# Altium PCB NM.BaseBoard.01.PcbDoc (part 2 of 2)
Units mm, origin at the board's own origin, x right, y up, seen from the top; angles counter-clockwise.
Board outline 100 x 120 mm, 2 copper layers (Top Layer, Bottom Layer), stack 0.747 mm thick; 54 components, 54 nets, 245 pads, 102 vias.
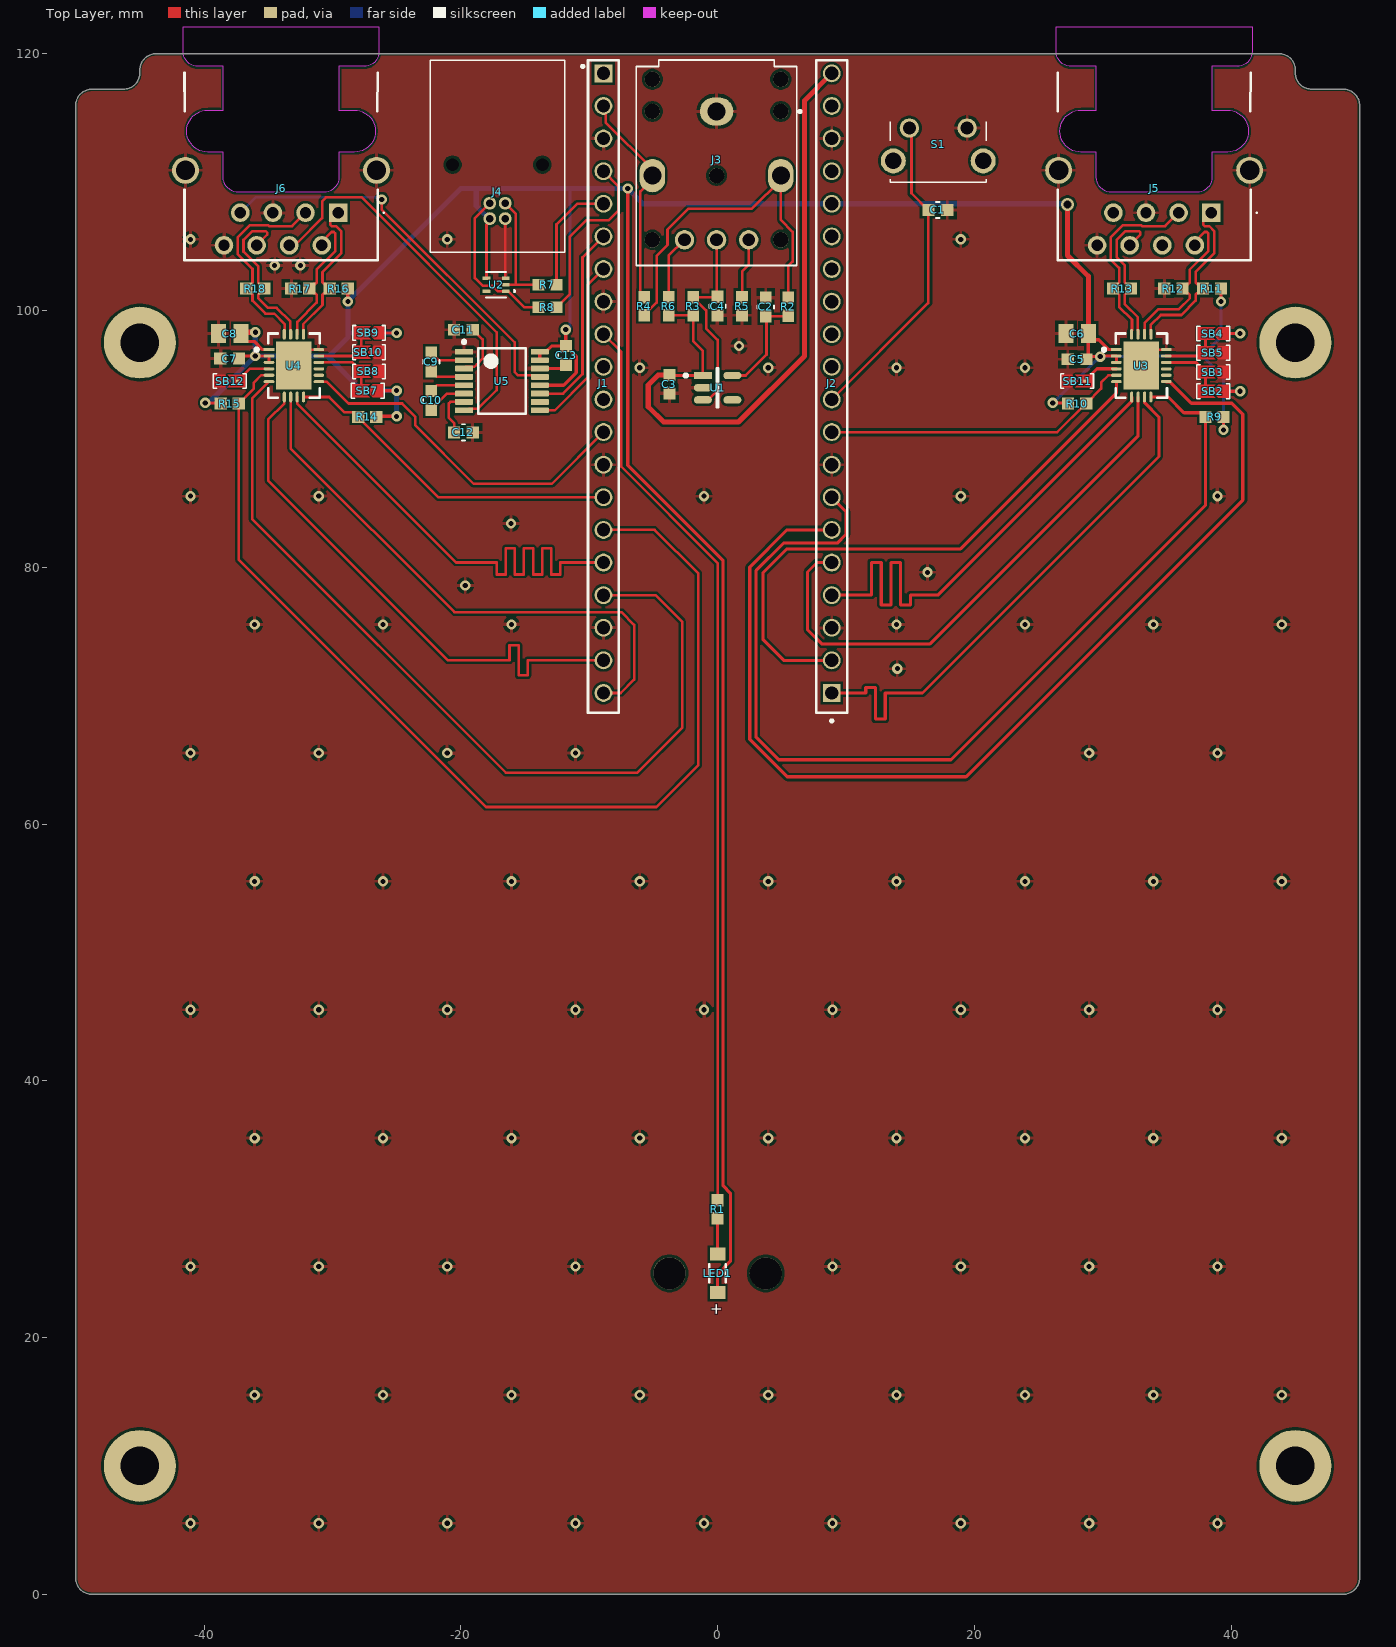
[diagram p0: Top Layer view]

## Silkscreen, mask and mechanical layers (free items; w line width, h text height) (continued)
Drill Drawing: (continued)
  text "Pad" at 188.228,9.38 h1.52
  text "(Mixed)" at 203.21,9.38 h1.52
  text "(Mixed)" at 222.153,9.38 h1.52
  text "101" at 74.468,5.57 h1.52
  text "15.75mil (0.400mm)" at 89.45,5.57 h1.52
  text "PTH" at 118.651,5.57 h1.52
  text "Round" at 131.5,5.57 h1.52
  text "Top Layer - Bottom Layer" at 150.139,5.57 h1.52
  text "Via" at 188.228,5.57 h1.52
  text "Rounded" at 203.21,5.57 h1.52
  text "v80h40m0mx0" at 222.153,5.57 h1.52
  text "195 Total" at 74.468,1.76 h1.52

## Text inside footprints (layer, text, board x,y; h text height)
LED1: Top Overlay "+" at -0.45,22.7 h0.89 r270